# Altium PCB Pre-Amp.PcbDoc
Units mm, origin at the board's own origin, x right, y up, seen from the top; angles counter-clockwise.
Board outline 40 x 40 mm, 2 copper layers (Top Layer, Bottom Layer); 26 components, 19 nets, 66 pads, 6 vias.
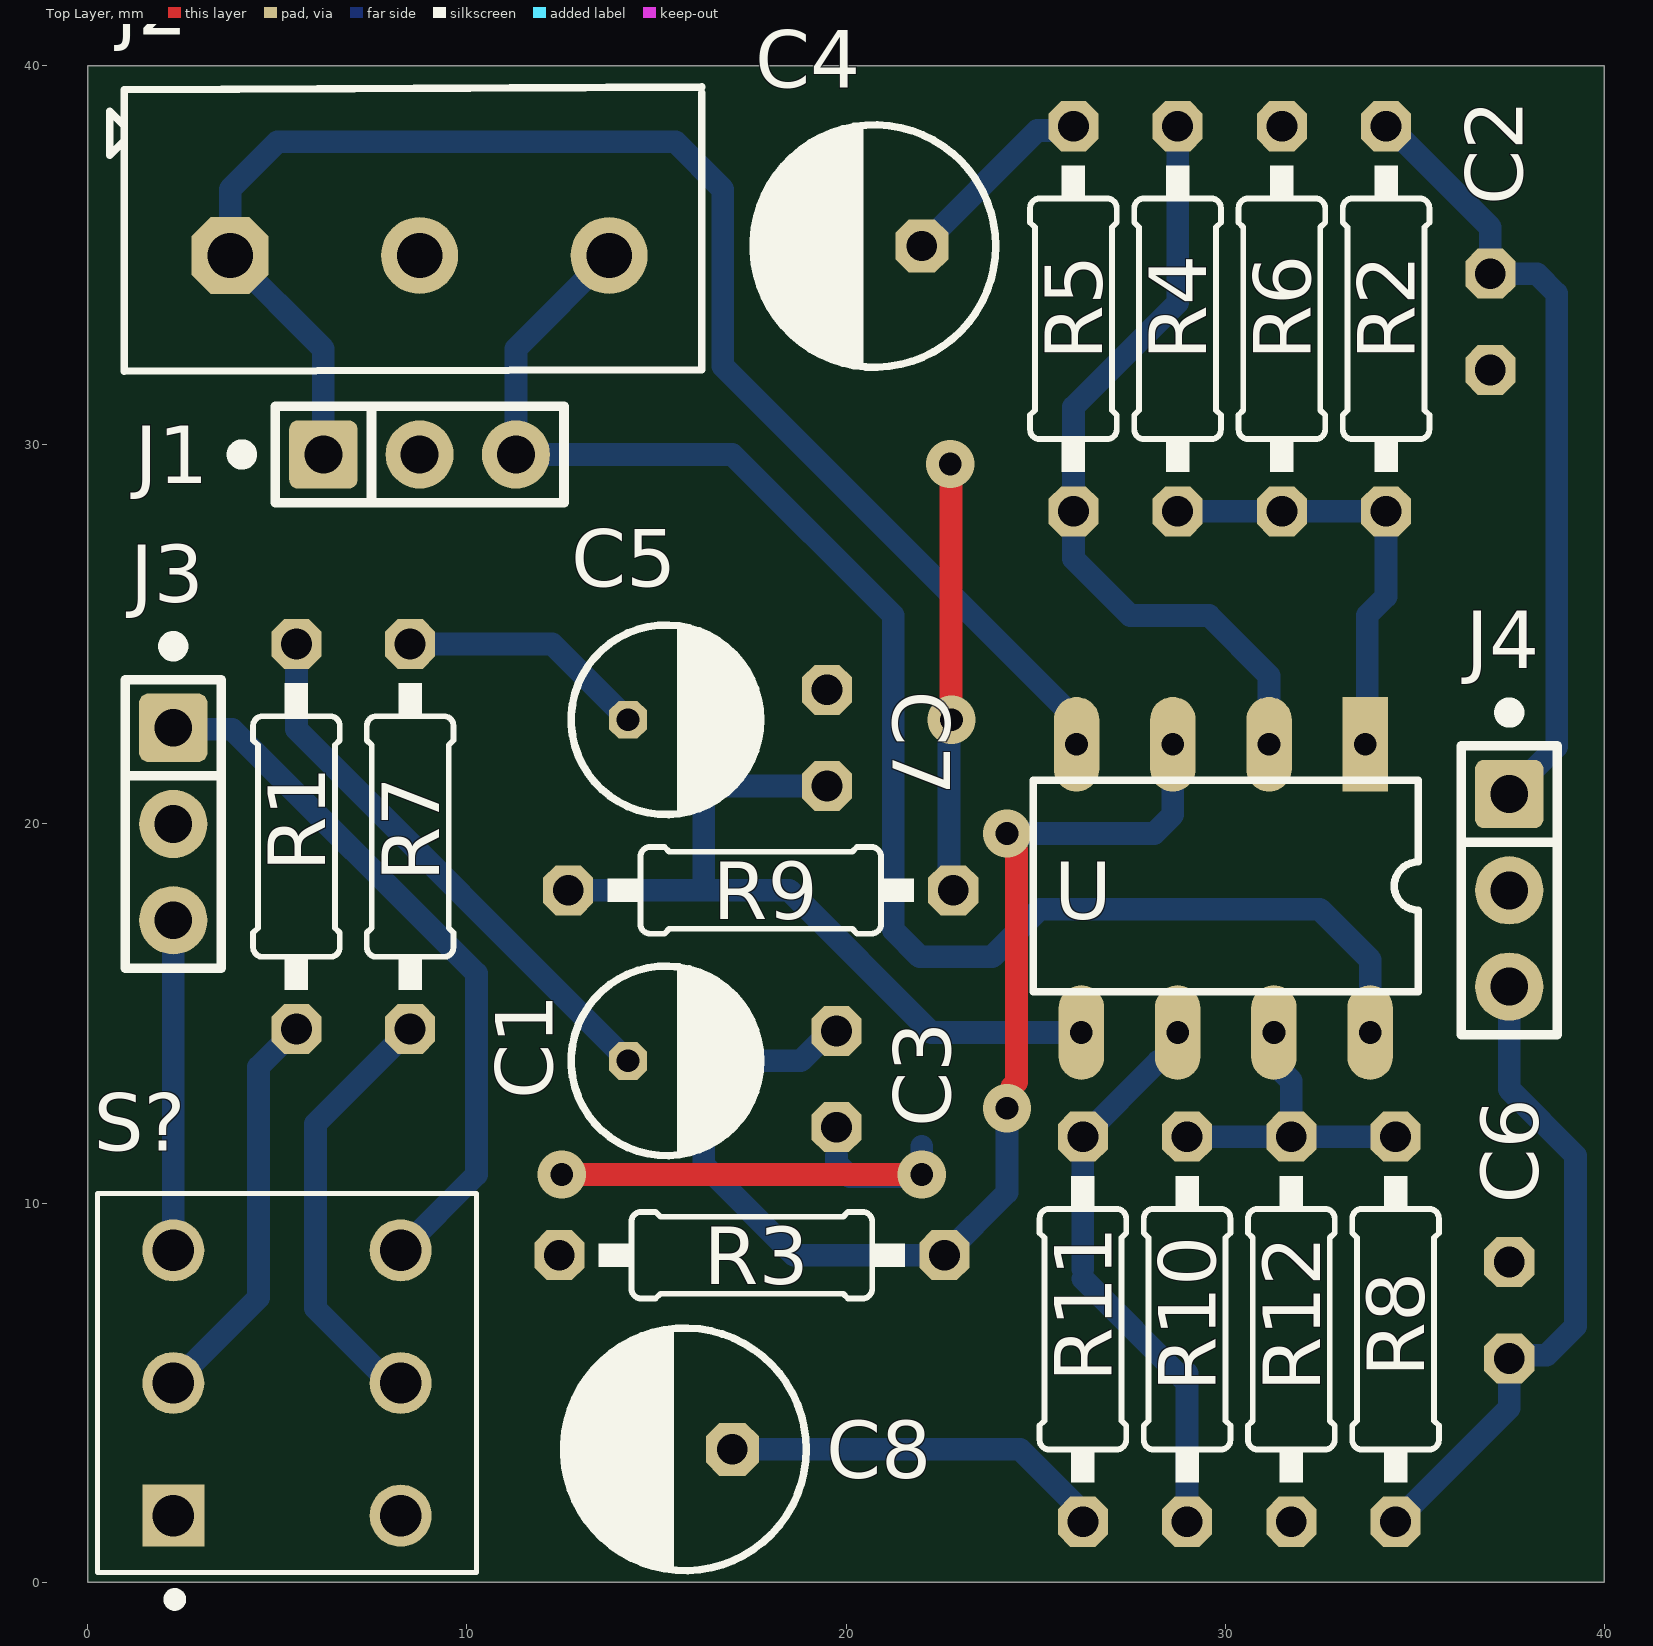
[diagram p0: Top Layer view]
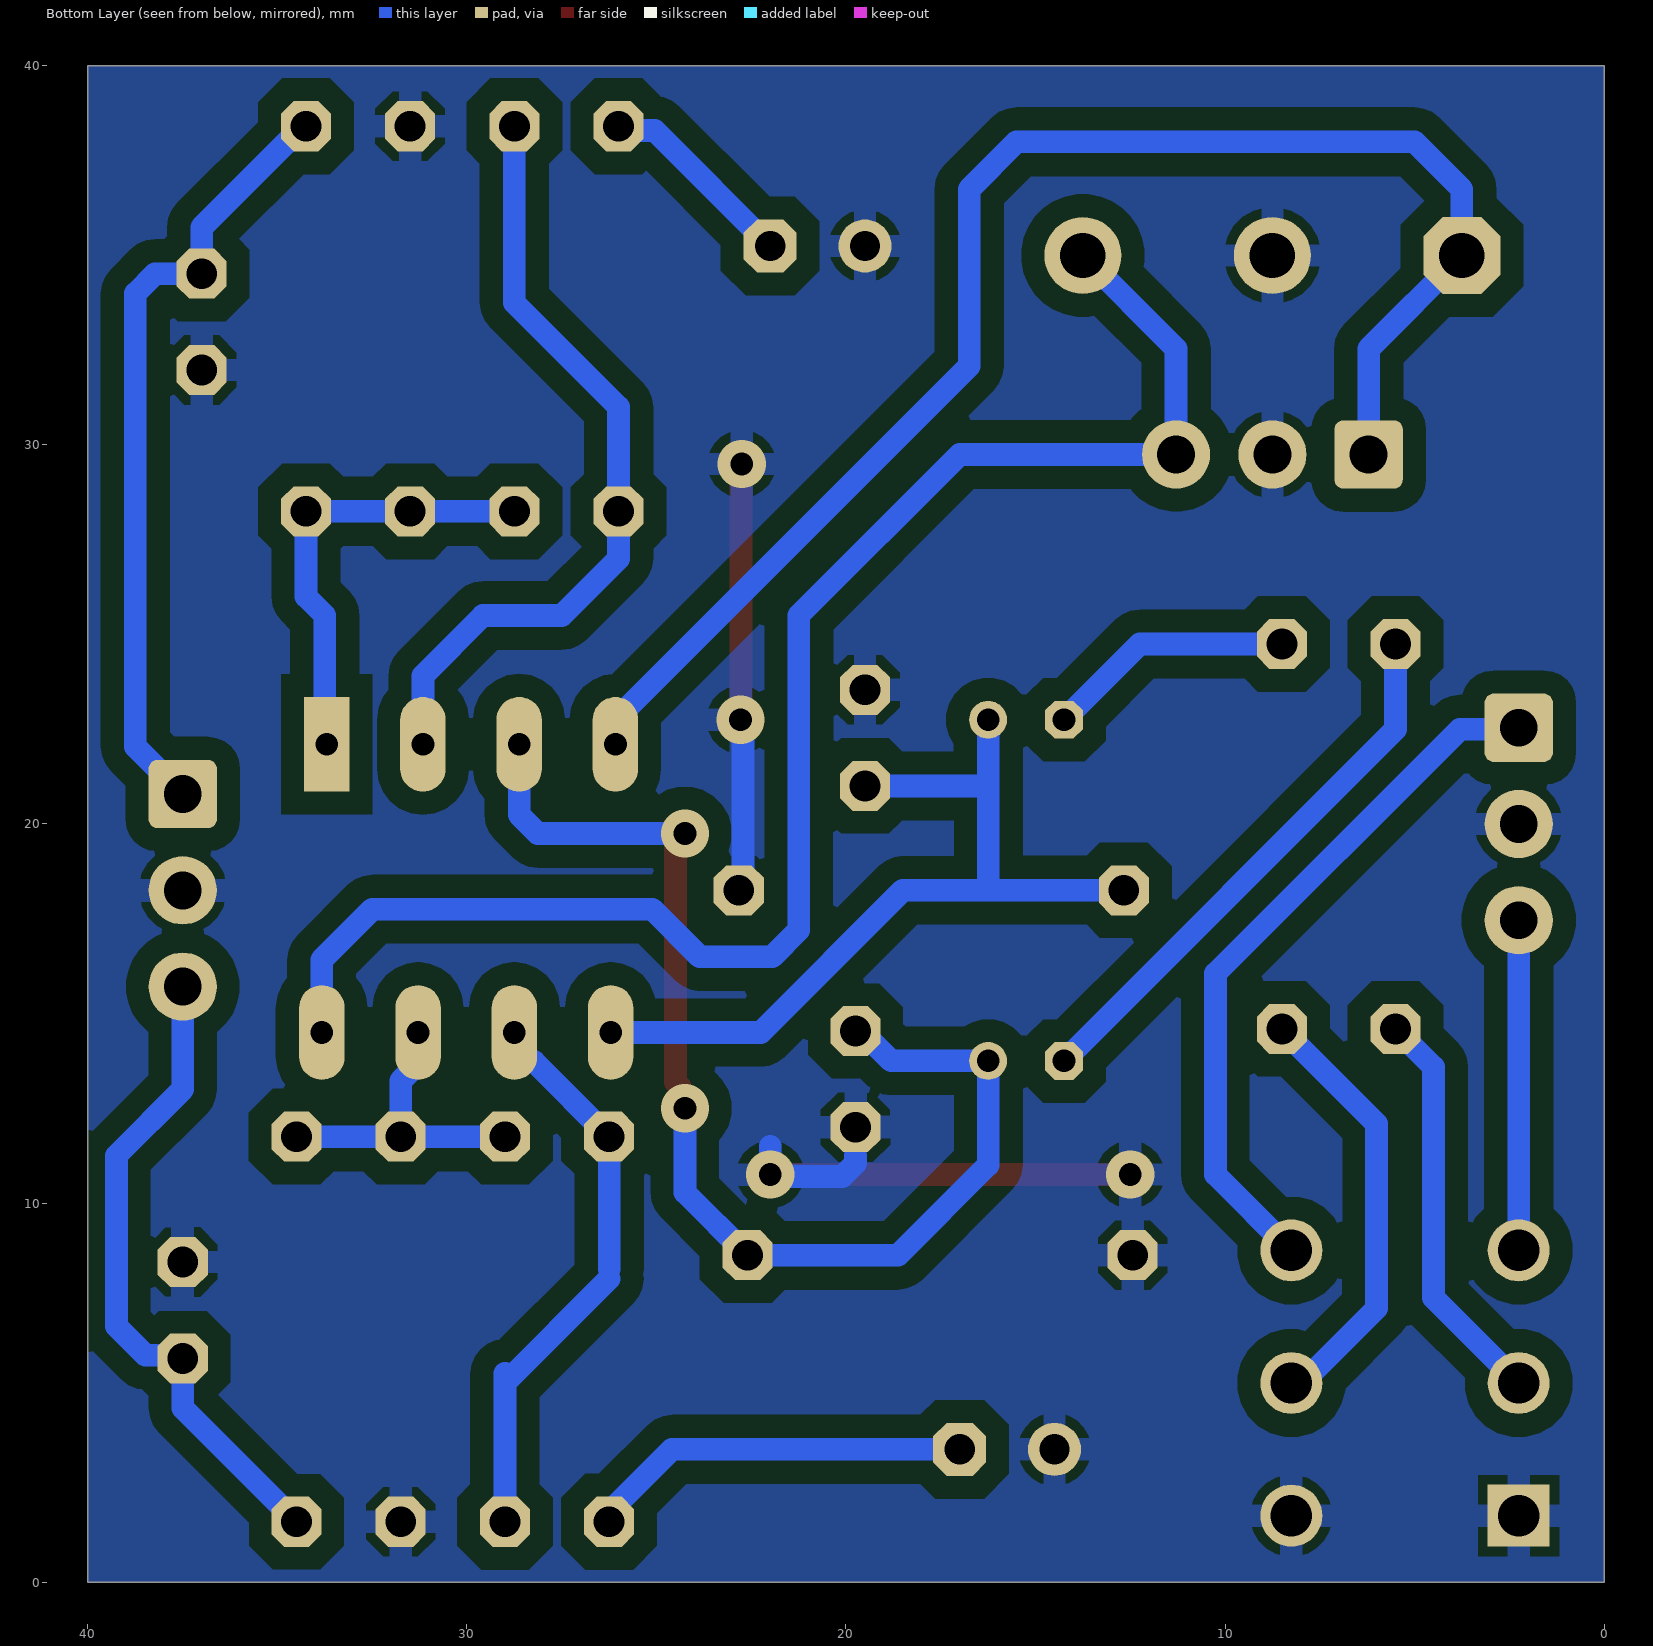
[diagram p1: Bottom Layer view, seen from below]
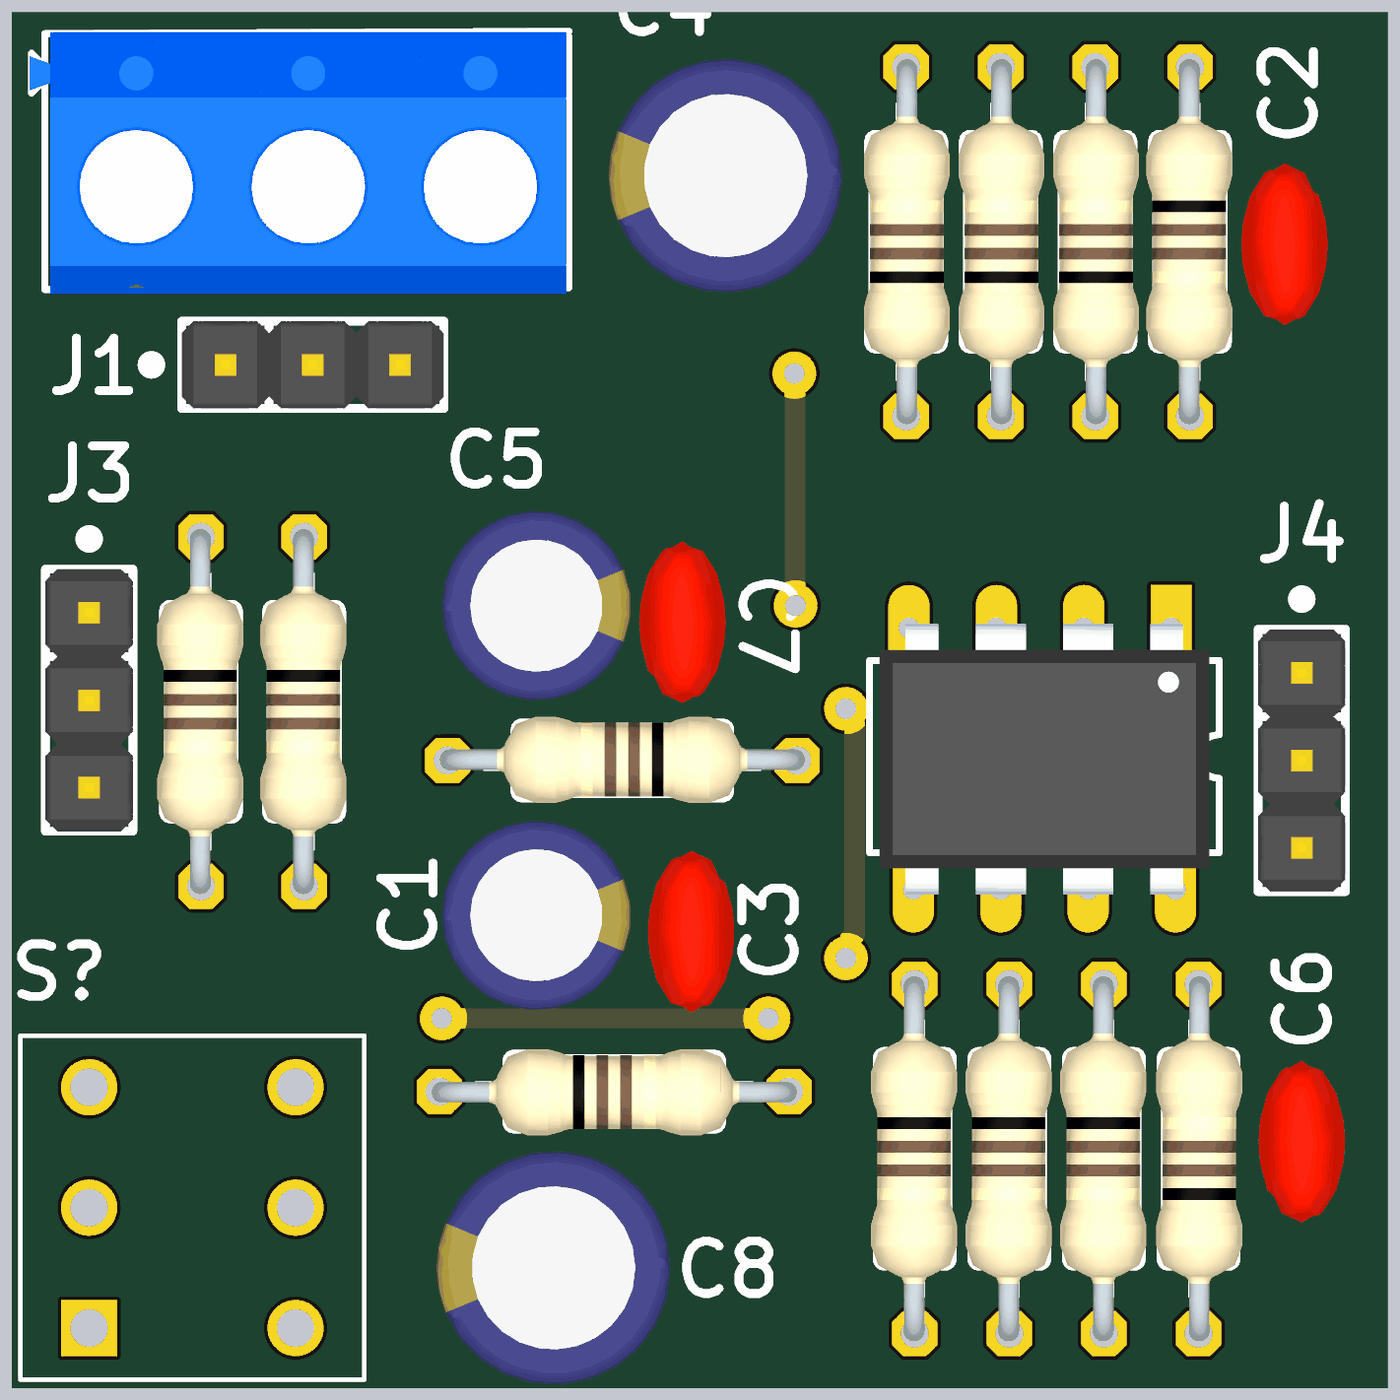
[diagram p2: 3D render of the assembled board from above, using the file's embedded part models]

## Layer stack, top to bottom
Top Solder: solder mask 0.0102, Solder Resist, Dk 3.5
Top Layer: signal copper 0.0356
Dielectric 1: dielectric 0.32, FR-4, Dk 4.8
Bottom Layer: signal copper 0.0356
Bottom Solder: solder mask 0.0102, Solder Resist, Dk 3.5

## Board outline
0,0 40,0 40,40 0,40

## Design rules (kind name [scope] priority, off if disabled: settings)
Clearance [All] p1: gap=0.6 ignorepadtopadclearanceinfootprint=FALSE
PolygonConnect [All] p1: connectstyle=Relief reliefconductorwidth=0.6 reliefentries=4 polygonreliefangle="90 Angle" airgapwidth=0.254
RoutingVias [All] p1: holewidth=0.8 width=1 viastyle="Through Hole" minholewidth=0.6 minwidth=1 maxholewidth=0.3 maxwidth=4
SolderMaskExpansion [All] p1: expansion=0.102 istentingtop=FALSE
Width [All] p1: maxlimit=3 minlimit=0.6 preferedwidth=0.8
30 further rules are at their usual default settings.

## Components (designator, comment, footprint, x,y, rotation, side; value= is the part's Value field where it differs from the comment)
C1 "Aluminium capacitor, 10uF, 25V, ±20%, 54mOhm, 14x10x5 mm, -55...+105°C" "CAP Electrolytic TH D5C2H11" 15.25,13.75 r0 top value=10uF
C2 "Ceramic capacitor, 100pF, X7R, ±10%, 16V, 0201, -55...+125°C" "Cap ceramic TH C025-024X044" 37,33.25 r270 top value=100pF
C3 "Ceramic capacitor, 100pF, X7R, ±10%, 16V, 0201, -55...+125°C" "Cap ceramic TH C025-024X044" 19.75,13.27 r270 top value=100pF
C4 "Aluminium capacitor, 47μF, 25V, ±20%, 54mOhm, 14x10x5 mm, -55...+105°C" "CAP Electrolytic TH D6.3C2.5H11" 20.75,35.25 r180 top value=47μF
C5 "Aluminium capacitor, 10uF, 25V, ±20%, 54mOhm, 14x10x5 mm, -55...+105°C" "CAP Electrolytic TH D5C2H11" 15.25,22.75 r0 top value=10uF
C6 "Ceramic capacitor, 100pF, X7R, ±10%, 16V, 0201, -55...+125°C" "Cap ceramic TH C025-024X044" 37.5,7.17 r90 top value=100pF
C7 "Ceramic capacitor, 100pF, X7R, ±10%, 16V, 0201, -55...+125°C" "Cap ceramic TH C025-024X044" 19.5,22.27 r90 top value=100pF
C8 "Aluminium capacitor, 47μF, 25V, ±20%, 54mOhm, 14x10x5 mm, -55...+105°C" "CAP Electrolytic TH D6.3C2.5H11" 15.75,3.5 r180 top value=47μF
J1 "pinheader 1x3" "Pin Header 1x3 TH Pitch 2.54mm" 6.21,29.75 r0 top
j2 "screw terminal 1x3" "screw terminal 1x3" 3.75,35 r90 top
J3 "pinheader 1x3" "Pin Header 1x3 TH Pitch 2.54mm" 2.25,22.54 r270 top
J4 "pinheader 1x3" "Pin Header 1x3 TH Pitch 2.54mm" 37.5,20.79 r270 top
R1 "Resistor film, 100R, ±5%, 0201, 0.05W, -55...+125°C" "RES TH 0.25W H 0207$10" 5.5,19.67 r90 top value=100R
R2 "Resistor film, 47R, ±5%, 0201, 0.05W, -55...+125°C" "RES TH 0.25W H 0207$10" 34.25,33.33 r90 top value=47R
R3 "Resistor film, 47k, ±5%, 0201, 0.05W, -55...+125°C" "RES TH 0.25W H 0207$10" 17.515,8.623 r180 top value=47k
R4 "Resistor film, 47k, ±5%, 0201, 0.05W, -55...+125°C" "RES TH 0.25W H 0207$10" 28.75,33.33 r270 top value=47k
R5 "Resistor film, 4.7k, ±5%, 0201, 0.05W, -55...+125°C" "RES TH 0.25W H 0207$10" 26,33.33 r270 top value=4.7k
R6 "Resistor film, 100k, ±5%, 0201, 0.05W, -55...+125°C" "RES TH 0.25W H 0207$10" 31.5,33.33 r270 top value=100k
R7 "Resistor film, 100R, ±5%, 0201, 0.05W, -55...+125°C" "RES TH 0.25W H 0207$10" 8.5,19.67 r90 top value=100R
R8 "Resistor film, 47R, ±5%, 0201, 0.05W, -55...+125°C" "RES TH 0.25W H 0207$10" 34.5,6.67 r270 top value=47R
R9 "Resistor film, 47k, ±5%, 0201, 0.05W, -55...+125°C" "RES TH 0.25W H 0207$10" 17.75,18.25 r0 top value=47k
R10 "Resistor film, 47k, ±5%, 0201, 0.05W, -55...+125°C" "RES TH 0.25W H 0207$10" 29,6.67 r90 top value=47k
R11 "Resistor film, 4.7k, ±5%, 0201, 0.05W, -55...+125°C" "RES TH 0.25W H 0207$10" 26.25,6.67 r90 top value=4.7k
R12 "Resistor film, 100k, ±5%, 0201, 0.05W, -55...+125°C" "RES TH 0.25W H 0207$10" 31.75,6.67 r90 top value=100k
S? "Switch DPDT" "Switch latching spring DPDT" 5.25,5.25 r90 top
U "OP-AMP NE5532AP" "IC DIP-8" 30.02,18.291 r270 top

## Footprints (in the part's own frame and the unit in brackets; to place one, negate y for a bottom-side part, rotate by r counter-clockwise, add the part's x,y. Pads: shape width x height; smd on the part's side, far side on the other; paste and mask are expansions set on the pad)
"Cap ceramic TH C025-024X044" [mil]
  oct 52x52 / inner round 48.04 / far side oct 52x52 hole 32: 1(-50,0) 2(50,0)
  body extent -93,-49 93,49, height 289
"CAP Electrolytic TH D5C2H11" [mm]
  oct 1x1 hole 0.6: 1(-1,0)
  round 1 hole 0.6: 2(1,0)
  silkscreen extent -2.5,-2.5 2.5,2.5, body extent -2.75,-2.75 2.75,2.75, height 13.5
"CAP Electrolytic TH D6.3C2.5H11" [mm]
  oct 1.4x1.4 hole 0.8: 1(-1.25,0)
  round 1.4 hole 0.8: 2(1.25,0)
  silkscreen extent -3.2,-3.2 3.2,3.2, body extent -3.4,-3.4 3.4,3.4, height 12.5
"IC DIP-8" [mm]
  rect 2.5x1.2 hole 0.6: 1(-3.81,3.683)
  oval 2.5x1.2 hole 0.6: 2(-3.81,1.143) 3(-3.81,-1.397) 4(-3.81,-3.937) 5(3.791,-3.81) 6(3.791,-1.27) 7(3.791,1.27) 8(3.791,3.81)
  silkscreen extent -2.87,-5.08 2.72,5.08, body extent -3.94,-4.79 3.94,4.79, height 5.08
"Pin Header 1x3 TH Pitch 2.54mm" [mm] "PinHeader 1x3 TH Pitch 2.54mm"
  rrect25% 1.8x1.8 hole 1: 1(0,0)
  round 1.8 hole 1: 2(2.54,0) 3(5.08,0)
  silkscreen extent -2.3,-1.27 6.35,1.27, body extent -1.27,-1.27 6.35,1.27, height 9.5
"RES TH 0.25W H 0207$10" [mil]
  oct 52x52 / inner round 48.04 / far side oct 52x52 hole 32: 1(-200,0) 2(200,0)
  silkscreen extent -159,-45 159,45, body extent -209,-48 209,50, height 89
"screw terminal 1x3" [mil]
  oct 80x80 hole 47.24: 1(0,0)
  round 80 hole 47.24: 2(0,-196.85) 3(0,-393.7)
  silkscreen extent -120,-490 175,125, body extent -125,-487 174,127, height 394
"Switch latching spring DPDT" [mm]
  rect 1.635x1.635 hole 1.09: 1(-3.5,3)
  round 1.635 hole 1.09: 2(0,3) 3(3.5,3) 4(-3.5,-3) 5(0,-3) 6(3.5,-3)
  silkscreen extent -5.86,-5 5,5

## Part data
C1 C4 C5 C8: library part "Capacitor Aluminium", Manufacturer=Wurth, Package="14x10x5 mm", PartNumber=860080475013, Temperature=-55...+105°C, Tolerance=±20%, TypeCapacitor="Aluminium capacitor", Voltage=25V, HelpURL=https://www.digikey.com/product-detail/en/wurth-electronics-inc/860080475013/732-9029-1-ND/5728972, Impedance=54mOhm
  C1 C5: ValueManufacturerPartNumber="Aluminium capacitor, 10uF, 25V, ±20%, 54mOhm, 14x10x5 mm, -55...+105°C"
  C4 C8: ValueManufacturerPartNumber="Aluminium capacitor, 47μF, 25V, ±20%, 54mOhm, 14x10x5 mm, -55...+105°C"
C2 C3 C6 C7: library part "Capacitor Ceramic", Manufacturer=Yageo, Package=0201, PartNumber=CC0201KRX7R7BB103, Temperature=-55...+125°C, Tolerance=±10%, TypeCapacitor="Ceramic capacitor", TypeDielectric=X7R, Voltage=16V, HelpURL=https://www.digikey.com/product-detail/en/yageo/CC0201KRX7R7BB103/311-1404-1-ND/2833710, ValueManufacturerPartNumber="Ceramic capacitor, 100pF, X7R, ±10%, 16V, 0201, -55...+125°C"
J1 J3 J4: "SAMTEC - TSW-103-07-F-S - Pin Header, Unshrouded, Board-to-Board, 2.54 mm, 1 Rows, 3 Contacts, Through Hole, TSW Series", Color=Black, Manufacturer=Samtec, Manufacturer Part Number=TSW-103-07-F-S, Max Current Rating=7.6A, Max Operating Temperature=125°C, Max Voltage Rating (AC)=550V, Min Operating Temperature=-55°C, Package Quantity=1, Supplier Part Number 1=SAM8995-ND, Category="Headers and Wire Housings", ComponentLink1Description=https://datasheet.ciiva.com/739/tsw-xxx-xx-xxx-x-xx-xxx-mkt-739892.pdf?src-supplier=Digi-Key, ComponentLink1URL=https://datasheet.ciiva.com/739/tsw-xxx-xx-xxx-x-xx-xxx-mkt-739892.pdf?src-supplier=Digi-Key, Connector Type="Male Pin", Contact Material=Bronze, Contact Mating Length=0.23inch, Contact Plating=Gold, Contact Type="Male Pin", Depth=2.54mm, Gender=Male, Housing Color=Black, Housing Material=Polyester, Length=7.62mm, Mount="Through Hole", Number of Contacts=3, Number of Positions=3, Number of Rows=1, Orientation=Vertical, Packaging=Rail/Tube, Pitch=2.54mm, Pricing 1="1=0.41000, 10=0.35000, 100=0.27220, 500=0.23332, 1000=0.19442, 5000=0.16665, 10000=0.15554 (USD)", Radiation Hardening=No, REACH SVHC="No SVHC", RoHS=Yes, RoHS Compliant=Yes, Series=TSW, Stock 1=23568, Supplier 1=Digi-Key, Termination=Solder
j2: "PCB Terminal Block 3 Poles, 5 mm Pitch, 691101710003, Würth Elektronik", Color=Blue, Current=16A, Manufacturer="Wurth Electronics", Manufacturer Part Number=691101710003, Max Operating Temperature=105°C, Min Operating Temperature=-40°C, Package Quantity=400, Supplier Part Number 1=732-2027-ND, Voltage=250V, Category="Terminal Blocks", ComponentLink1Description=https://datasheet.ciiva.com/824/6911017100xx-824072.pdf?src-supplier=Digi-Key, ComponentLink1URL=https://datasheet.ciiva.com/824/6911017100xx-824072.pdf?src-supplier=Digi-Key, Contact Material=Brass, Contact Plating=Tin, Current Rating=16A, Height=16.4mm, Housing Material=PA66, Length=9mm, Mount="Through Hole", Number of Contacts=3, Number of Levels=1, Number of Positions Per Level=3, Packaging=Bulk, Pitch=0.197inch, Plating=Steel, Pricing 1="1=0.96000, 10=0.86200, 50=0.74500, 100=0.69120 (USD)", REACH SVHC=Unknown, RoHS=Yes, RoHS Compliant=Yes, Series="WR-TBL Series 101", Stock 1=955, Stripping Length=-7mm, Supplier 1=Digi-Key, Termination=Screw, Voltage Rating=250V, Width=16.2mm, Wire Gauge (Max)=26AWG, Wire Gauge (Min)=14AWG, Wire/Cable Gauge=26AWG
R1 R2 R3 R4 R5 R6 R7 R8 R9 R10 R11 R12: library part "Resistor Fixed", Manufacturer=Yageo, Package=0201, PartNumber=RC0201JR-07100RL, Power=0.05W, Temperature=-55...+125°C, Tolerance=±5%, TypeResistor="Resistor film", HelpURL=https://www.digikey.com/product-detail/en/yageo/RC0201JR-07100RL/311-100NCT-ND/1949006
  R1 R7: ValueManufacturerPartNumber="Resistor film, 100R, ±5%, 0201, 0.05W, -55...+125°C"
  R2 R8: ValueManufacturerPartNumber="Resistor film, 47R, ±5%, 0201, 0.05W, -55...+125°C"
  R3 R4 R9 R10: ValueManufacturerPartNumber="Resistor film, 47k, ±5%, 0201, 0.05W, -55...+125°C"
  R5 R11: ValueManufacturerPartNumber="Resistor film, 4.7k, ±5%, 0201, 0.05W, -55...+125°C"
  R6 R12: ValueManufacturerPartNumber="Resistor film, 100k, ±5%, 0201, 0.05W, -55...+125°C"
S?: "Switch Toggle ON ON DPDT Long Baton Lever PC Pins 20VAC 20VDC 0.4VA PC Mount with Threads", Package="TO-94 TE Connectivity", Availability=Unavailable, EU_RoHS_Compliance="Compliant with Exemptions", MF="TE Connectivity", MP=2267077-2, Price=None, SnapEDA_Link=https://www.snapeda.com/parts/2267077-2/TE%20Connectivity%20ALCOSWITCH%20Switches/view-part/2377537/?ref=snap
U: "General Purpose Amplifier 2 Circuit 8-PDIP", Package="PDIP-8 Texas Instruments", Availability=Unavailable, MF="Texas Instruments", MP=NE5532AP, Price=None, SnapEDA_Link=https://www.snapeda.com/parts/NE5532AP/Texas%20Instruments/view-part/9041/?ref=snap

## Via types
v1: diameter 1.27, hole 0.6, Top Layer to Bottom Layer, 6 vias

## Nets (pads, with @x,y where several pads share a name; then routed paths per layer and width w, separated by ;. In a path a pad name is that pad's centre, name@x,y a point inside that pad or via, vN(x,y) a via of type N, cw(c..) or ccw(c..) an arc to the next point about the centre after c; other vN are vias at no path point)
-VCC: J1.1 j2.1 U.4 | length 40.6
  Bottom Layer w0.6: J1.1 6.21,32.54 j2.1 3.75,36.75 5,38 15.5,38 16.75,36.75 16.75,32.084 26.083,22.751 U.4
GND: C2.2 C3.2 C4.2 C6.2 C7.2 C8.2 J1.2 j2.2 J3.2 J4.2 R3.2 R6.1 R9.2 R12.1 S?.1 S?.4 | length 23.7
  Top Layer w0.6: v1(12.5,10.75) v1(22,10.75) ; v1(22.75,29.5) 22.767,29.483 22.767,22.768 v1(22.785,22.75)
  Bottom Layer w0.6: 19.75,11.25 19.75,11.051 20.101,10.7 v1@21.517,10.7 ; v1(22,10.75) 22,11.5 ; v1(22.785,22.75) 22.715,22.68 22.715,18.365 R9.2
NetC1_1: C1.1 R1.2 | length 14.6
  Bottom Layer w0.6: R1.2 5.5,22.5 C1.1
NetC1_2: C1.2 C3.1 R3.1 U.3 | length 32.5
  Top Layer w0.6: C3.1 C3.1@19.956,14.746 ; v1(24.25,12.5) 24.378,12.628 24.378,13.065 24.5,13.186 24.5,19.319 24.25,19.569 v1(24.25,19.75)
  Bottom Layer w0.6: C3.1 19.596,14.54 18.806,13.75 C1.2 16.25,11 18.627,8.623 R3.1@22.441,8.623 ; R3.1 24.25,10.278 v1(24.25,12.5) ; v1(24.25,19.75) 28.132,19.75 28.623,20.241 U.3
NetC2_1: C2.1 J4.1 R2.2 | length 20.8
  Bottom Layer w0.6: R2.2 34.334,38.41 37,35.744 C2.1 38.23,34.52 38.75,34 38.75,22.04 J4.1
NetC4_1: C4.1 R5.1 | length 5.4
  Bottom Layer w0.6: C4.1@21.949,35.199 25.048,38.298 25.888,38.298 R5.1
NetC5_1: C5.1 R7.2 | length 6.6
  Bottom Layer w0.6: R7.2 12.25,24.75 C5.1
NetC5_2: C5.2 C7.1 R9.1 U.5 | length 22.8
  Bottom Layer w0.6: R9.1 16.25,18.25 ; C5.2 16.25,21 ; C7.1 16.25,21 ; U.5 22.25,14.5 18.5,18.25 16.25,18.25 ; 16.25,18.25 16.25,21
NetC6_1: C6.1 J4.3 R8.2 | length 17.3
  Bottom Layer w0.6: R8.2 37.5,4.59 C6.1 37.582,5.982 38.482,5.982 39.25,6.75 39.25,11.25 37.5,13 J4.3
NetC8_1: C8.1 R11.1 | length 9.9
  Bottom Layer w0.6: C8.1 24.59,3.5 R11.1@26.25,1.84
NetJ3_1: J3.1 S?.6 | length 18.8
  Bottom Layer w0.6: J3.1 2.29,22.5 3.803,22.5 10.25,16.053 10.25,10.75 S?.6
NetJ3_3: J3.3 S?.3 | length 8.7
  Bottom Layer w0.6: S?.3 J3.3
NetR1_1: R1.1 S?.2 | length 10.7
  Bottom Layer w0.6: S?.2 4.5,7.5 4.5,13.59 R1.1
NetR2_1: R2.1 R4.2 R6.2 U.1 | length 11.9
  Bottom Layer w0.6: R4.2 R6.2 R2.1 34.25,26 33.75,25.5 33.75,22.148 U.1
NetR4_1: R4.1 R5.2 U.2 | length 20.8
  Bottom Layer w0.6: R4.1 28.75,33.75 26,31 R5.2 26,27 27.5,25.5 29.576,25.5 31.163,23.913 U.2
NetR7_1: R7.1 S?.5 | length 11.5
  Bottom Layer w0.6: S?.5 7.97,5.25 6,7.22 6,12.09 R7.1
NetR8_1: R8.1 R10.2 R12.2 U.7 | length 8.4
  Bottom Layer w0.6: R10.2 R12.2 ; U.7 31.29,13.688 31.75,13.228 R12.2 ; R8.1 R12.2
NetR10_1: R10.1 R11.2 U.6 | length 15
  Bottom Layer w0.6: 26.25,8 29,5.25 ; 26.25,8.25 R11.2 28.235,13.735 28.473,13.735 28.75,14.012 U.6 ; R10.1@29,1.84 29,5.5
VCC: J1.3 j2.3 U.8 | length 42.1
  Bottom Layer w0.6: j2.3 11.29,32.54 J1.3 17,29.75 21.25,25.5 21.25,17.197 21.947,16.5 23.859,16.5 25.109,17.75 32.5,17.75 33.83,16.42 U.8

## Polygon pours and split planes (outlines as drawn)
GND on Bottom Layer "GND_L02_P000" (solid, pour order 0): 0,0 40,0 40,40 0,40